# Altium PCB Stamp-C5.PcbDoc
Units mm, origin at the board's own origin, x right, y up, seen from the top; angles counter-clockwise.
Board outline 17.6 x 18 mm, 2 copper layers (Top Layer, Bottom Layer); 1 components, 0 nets, 49 pads, 0 vias.
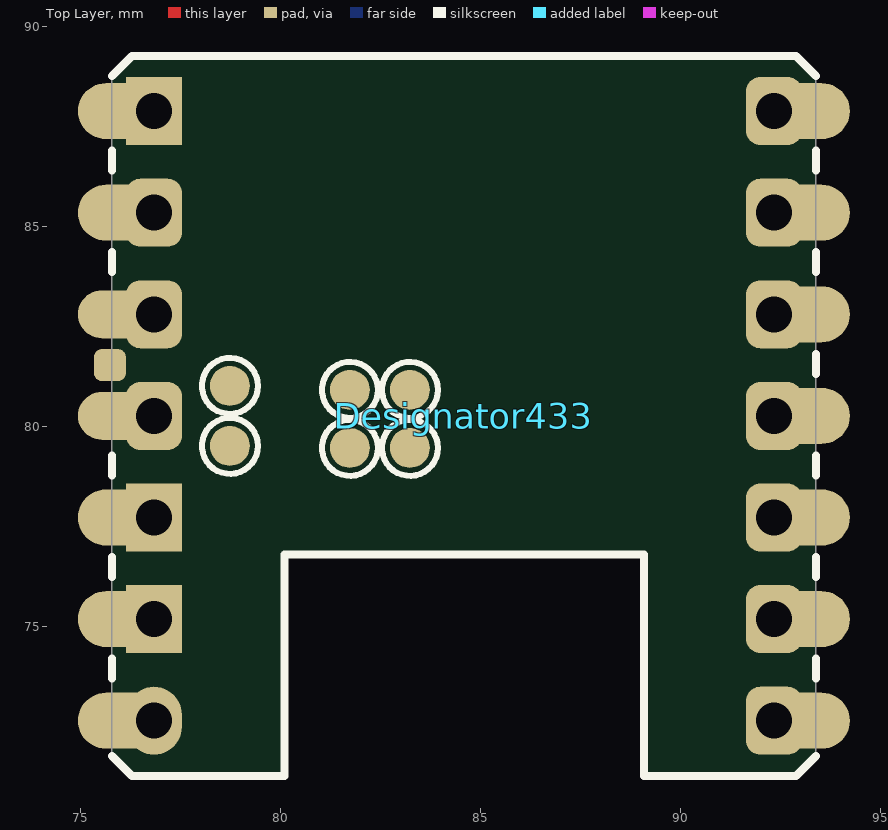
[diagram p0: Top Layer view]
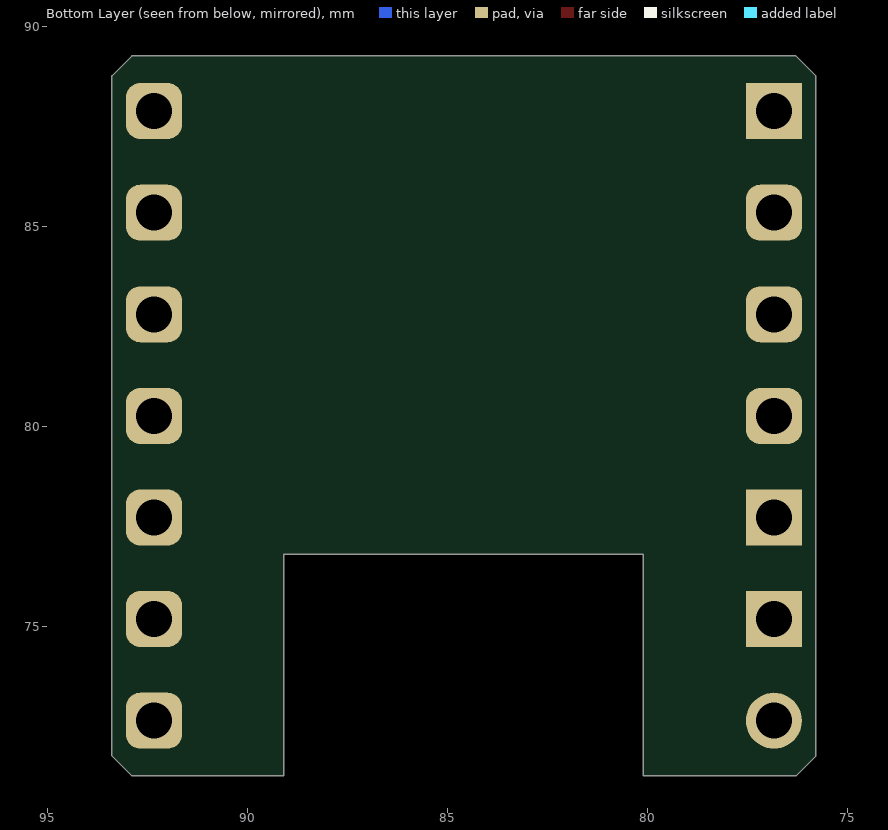
[diagram p1: Bottom Layer view, seen from below]

## Layer stack, top to bottom
Top Solder: solder mask 0.0102, Solder Resist, Dk 3.5
Top Layer: signal copper 0.0356
Dielectric 1: dielectric 0.32, FR-4, Dk 4.8
Bottom Layer: signal copper 0.0356
Bottom Solder: solder mask 0.0102, Solder Resist, Dk 3.5

## Board outline
75.782,71.764 75.782,88.764 76.282,89.264 92.882,89.264 93.382,88.764 93.382,71.764 92.882,71.264 89.082,71.264 89.082,76.801 80.102,76.801 80.102,71.264 76.282,71.264

## Design rules (kind name [scope] priority, off if disabled: settings)
Clearance [All] p1: gap=0.254 ignorepadtopadclearanceinfootprint=FALSE
PolygonConnect [All] p1: connectstyle=Relief reliefconductorwidth=0.254 reliefentries=4 polygonreliefangle="90 Angle" airgapwidth=0.254
RoutingVias [All] p1: holewidth=0.711 width=1.27 viastyle="Through Hole" minholewidth=0.711 minwidth=1.27 maxholewidth=0.711 maxwidth=1.27
SolderMaskExpansion [All] p1: expansion=0.102 istentingtop=FALSE
Width [All] p1: maxlimit=0.254 minlimit=0.254 preferedwidth=0.254
30 further rules are at their usual default settings.

## Components (designator, comment, footprint, x,y, rotation, side; value= is the part's Value field where it differs from the comment)
Designator433 "Comment" STAMP_C5 84.582,80.264 r0 top

## Footprints (in the part's own frame and the unit in brackets; to place one, negate y for a bottom-side part, rotate by r counter-clockwise, add the part's x,y. Pads: shape width x height; smd on the part's side, far side on the other; paste and mask are expansions set on the pad)
STAMP_C5 [mm]
  round 1.4 smd: 1(-8.95,7.62) 2(-8.95,5.08) 5(-8.95,-2.54) 6(-8.95,-5.08) 7(-8.95,-7.62) 8(8.95,-7.62) 9(8.95,-5.08) 10(8.95,-2.54) 11(8.95,0) 12(8.95,2.54) 13(8.95,5.08) 14(8.95,7.62)
  rect 1.2x1.4 smd paste-2539.97: 1(-8.35,7.62) 2(-8.35,5.08) 5(-8.35,-2.54) 6(-8.35,-5.08) 7(-8.35,-7.62) 8(8.35,-7.62) 9(8.35,-5.08) 10(8.35,-2.54) 11(8.35,0) 12(8.35,2.54) 13(8.35,5.08) 14(8.35,7.62)
  rect 1.4x1.7 / inner rect 1.4x1.7 / far side rect 1.4x1.4 hole 0.9 paste-2539.97: 1(-7.75,7.62) 5(-7.75,-2.54) 6(-7.75,-5.08)
  rrect50% 1.4x1.7 / inner rrect50% 1.4x1.7 / far side rrect50% 1.4x1.4 hole 0.9 paste-2539.97: 2(-7.75,5.08) 3(-7.75,2.54) 4(-7.75,0)
  oval 1.4x1.2 smd: 3(-8.95,2.54) 4(-8.95,0)
  rect 1.2x1.2 smd paste-2539.97: 3(-8.35,2.54) 4(-8.35,0)
  oval 1.4x1.7 / inner oval 1.4x1.7 / far side round 1.4 hole 0.9 paste-2539.97: 7(-7.75,-7.62)
  rrect50% 1.4x1.7 / inner rrect50% 1.4x1.7 / far side rrect50% 1.4x1.4 hole 0.9: 8(7.75,-7.62) 9(7.75,-5.08) 10(7.75,-2.54) 11(7.75,0) 12(7.75,2.54) 13(7.75,5.08) 14(7.75,7.62)
  rrect50% 0.8x0.8 smd mask+0.051: 15(-8.85,1.27)
  round 1 smd paste-1: 16(-5.85,0.75) 17(-5.85,-0.75) 18(-2.85,0.65) 19(-2.85,-0.8) 20(-1.35,0.65) 21(-1.35,-0.8)
  silkscreen extent -8.8,-9 8.8,9, body extent -8.8,-10.06 8.8,9, height 3.36

## Nets (pads, with @x,y where several pads share a name; then routed paths per layer and width w, separated by ;. In a path a pad name is that pad's centre, name@x,y a point inside that pad or via, vN(x,y) a via of type N, cw(c..) or ccw(c..) an arc to the next point about the centre after c; other vN are vias at no path point)
pads on no net: Designator433.1 Designator433.2 Designator433.3 Designator433.4 Designator433.5 Designator433.6 Designator433.7 Designator433.8 Designator433.9 Designator433.10 Designator433.11 Designator433.12 Designator433.13 Designator433.14 Designator433.15 Designator433.16 Designator433.17 Designator433.18 Designator433.19 Designator433.20 Designator433.21

## Silkscreen, mask and mechanical layers (free items; w line width, h text height)
Mechanical 1:
  lines w0.1: 75.782,88.764 76.282,89.264 ; 75.782,88.764 75.782,71.764 76.282,71.264 80.102,71.264 80.102,76.801 89.082,76.801 89.082,71.264 92.882,71.264 93.382,71.764 93.382,88.764 92.882,89.264 76.282,89.264 ; 75.782,88.764 76.282,89.264